# EAGLE board dcc-promicro (EAGLE 6.6.0)
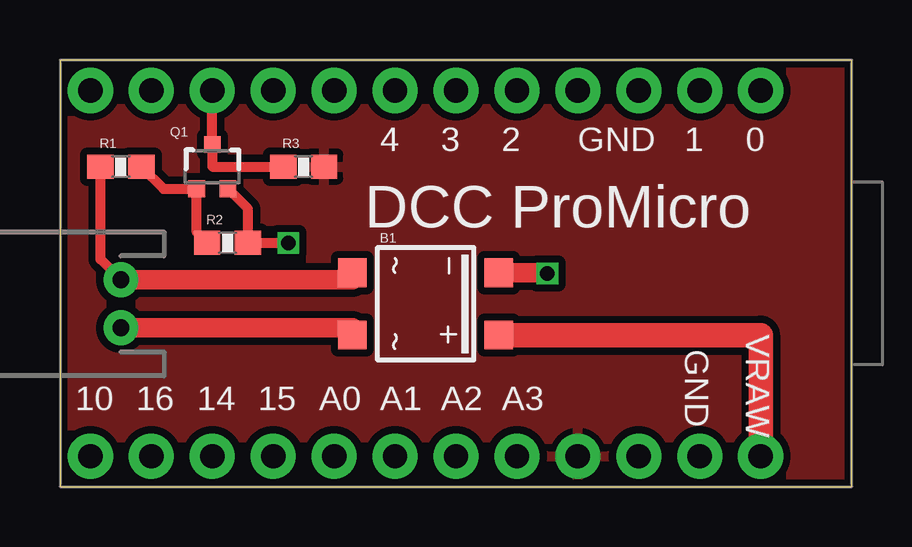
[diagram p0: board, top side]
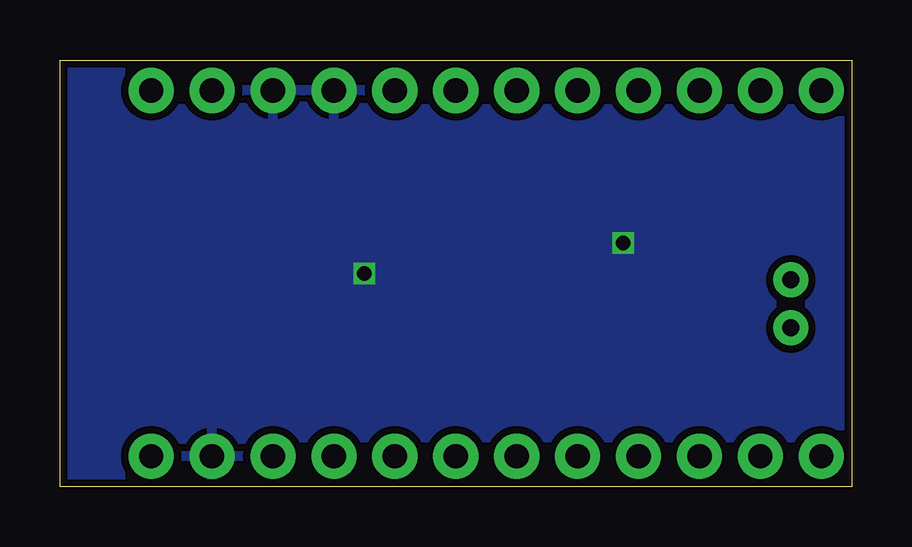
[diagram p1: board, bottom side, seen from below]

Size 33.01 x 17.78 mm. Coordinates in mm from the lower left corner, seen from the top.
Outline: 0,17.78 0,0 33.01,0 33.01,17.78 0,17.78
Copper layers (1*2*15*16): Top 0.035mm / dielectric 0.2mm / Route2 0.0175mm / dielectric 1.1mm / Route15 0.0175mm / dielectric 0.2mm / Bottom 0.035mm
Design rules "SeeedStudio_DRU_no_angle_20130527": minimum track width 6mil, minimum drill 12mil, track to track 6mil, track to pad 6mil, pad to pad 6mil, via to via 6mil, smd to smd 0mil, copper to edge 10mil, drill to drill 10mil, minimum pad ring 6mil, minimum via ring 6mil, stop-mask expansion 2mil, vias tented up to drill 25mil, thermal gap 10mil

## Footprints (pad centres in the part's own frame; a part is rotated, then mirrored left to right if it is on the bottom)
SOIC-4 = smd 1.2 x 1.2: + 1.3,3.05; - -1.3,3.05; ~1 -1.3,-3.05; ~2 1.3,-3.05
JST-2-PTH-NS = drill 0.7 pad 1.448: 1 -1,0; 2 1,0
SOT323 = smd 0.7 x 0.7: 1 -0.65,-0.925; 2 0.65,-0.925; 3 0,0.925
0603-RES = smd 1.1 x 1: 1 -0.85,0; 2 0.85,0
ARDUINO_PRO_MICRO = drill 1.016 pad 1.88: 1 -7.62,12.7; 2 -7.62,10.16; 3 -7.62,7.62; 4 -7.62,5.08; 5 -7.62,2.54; 6 -7.62,0; 7 -7.62,-2.54; 8 -7.62,-5.08; 9 -7.62,-7.62; 10 -7.62,-10.16; 11 -7.62,-12.7; 12 -7.62,-15.24; 13 7.62,-15.24; 14 7.62,-12.7; 15 7.62,-10.16; 16 7.62,-7.62; 17 7.62,-5.08; 18 7.62,-2.54; 19 7.62,0; 20 7.62,2.54; 21 7.62,5.08; 22 7.62,7.62; 23 7.62,10.16; 24 7.62,12.7

## Placement (x,y rotation side)
B1  MB1S  [SOIC-4]  15.24,7.62 270 top
DCC-IN  M02-JST-2-PTH-NO_SILK  [JST-2-PTH-NS]  2.54,7.62 90 top
Q1  MOSFET-NCHANNEL2N7002PW  [SOT323]  6.35,13.34 0 top
R1  47K  [0603-RES]  2.54,13.34 0 top
R2  100K  [0603-RES]  6.99,10.16 0 top
R3  10K  [0603-RES]  10.16,13.34 0 top
U$1  ARDUINO_PRO_MICRO  [ARDUINO_PRO_MICRO]  16.51,8.89 270 top

## Library data of the parts
B1 = rectifier
DCC-IN = SparkFun-Connectors
Q1 = SparkFun-DiscreteSemi; PROD_ID: TRANS-11151
R1-R3 = SparkFun-Passives
U$1 = SparkFun-Boards

## Nets
5V: R3.2 U$1.21
DCC-INT: Q1.3 R3.1 U$1.10
GND: B1.- Q1.2 R2.2 U$1.3 U$1.4 U$1.23
N$1: Q1.1 R1.2 R2.1
N$3: B1.~1 DCC-IN.2 R1.1
N$4: B1.~2 DCC-IN.1
SCL: U$1.6
SDA: U$1.5
VRAW: B1.+ U$1.24

## Tracks (layer width: path | path; a pad name or v marks a point on that pad's centre or on a via)
5V
  pour Top (isolate 0.305): 0,17.78 33.02,17.78 33.02,0 0,0
DCC-INT
  Top 0.406: U$1.10 Q1.3 6.35,13.34 R3.1
GND  (via drill 0.6)
  Top 0.406: v9.53,10.16 R2.2 7.83,11.57 Q1.2
  Top 0.813: B1.- 20.32,8.92 v20.32,8.89
  pour Bottom (isolate 0.305): 0,17.78 33.02,17.78 33.02,0 0,0
N$1
  Top 0.406: R1.2 4.32,12.41 Q1.1 5.7,10.6 R2.1
N$3
  Top 0.406: DCC-IN.2 1.69,9.47 R1.1
  Top 0.813: DCC-IN.2 12.19,8.62 B1.~1
N$4
  Top 0.813: DCC-IN.1 12.19,6.62 B1.~2
VRAW
  Top 1.016: B1.+ 29.21,6.32 U$1.24

## Text on the board
tPlace: 4 | 3 | 2 | GND | 1 | 0 | DCC ProMicro | GND | VRAW | 10 | 16 | 14 | 15 | A0 | A1 | A2 | A3